# Altium PCB concentrator_pcb.PcbDoc
Units mm, origin at the board's own origin, x right, y up, seen from the top; angles counter-clockwise.
Board outline 36.52 x 56.52 mm, 2 copper layers (Top Layer, Bottom Layer); 49 components, 50 nets, 270 pads, 44 vias.
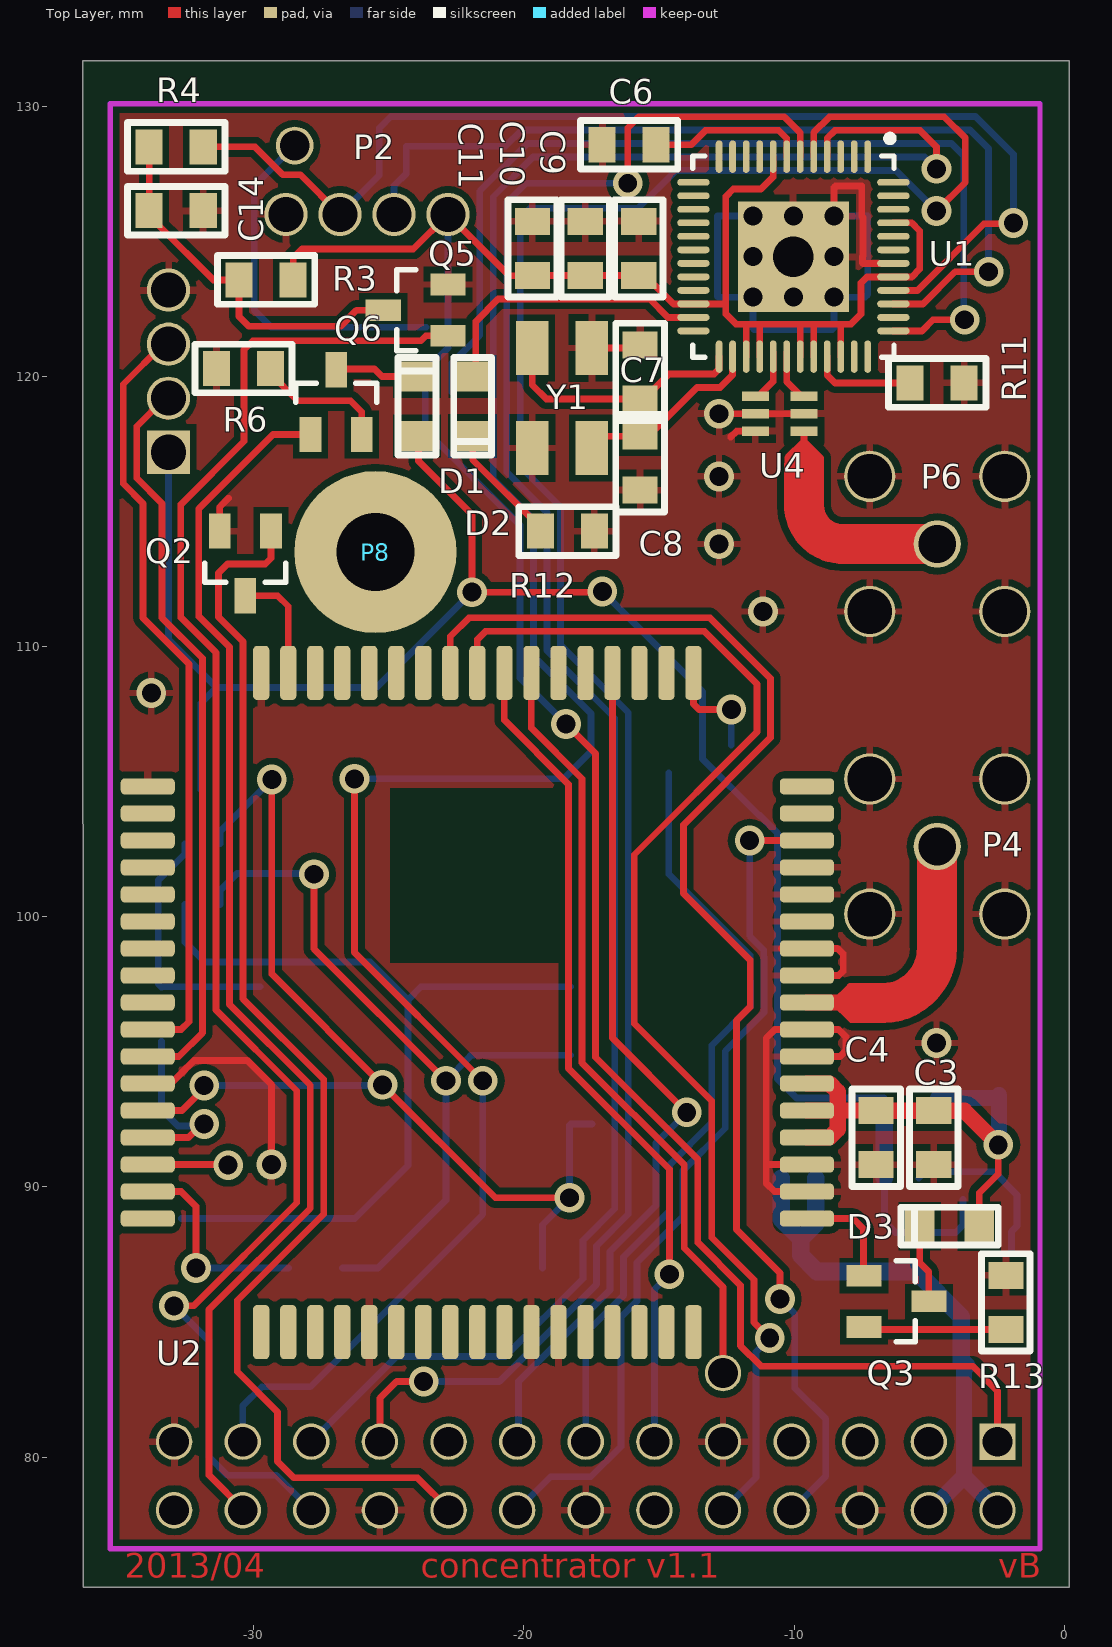
[diagram p0: Top Layer view]
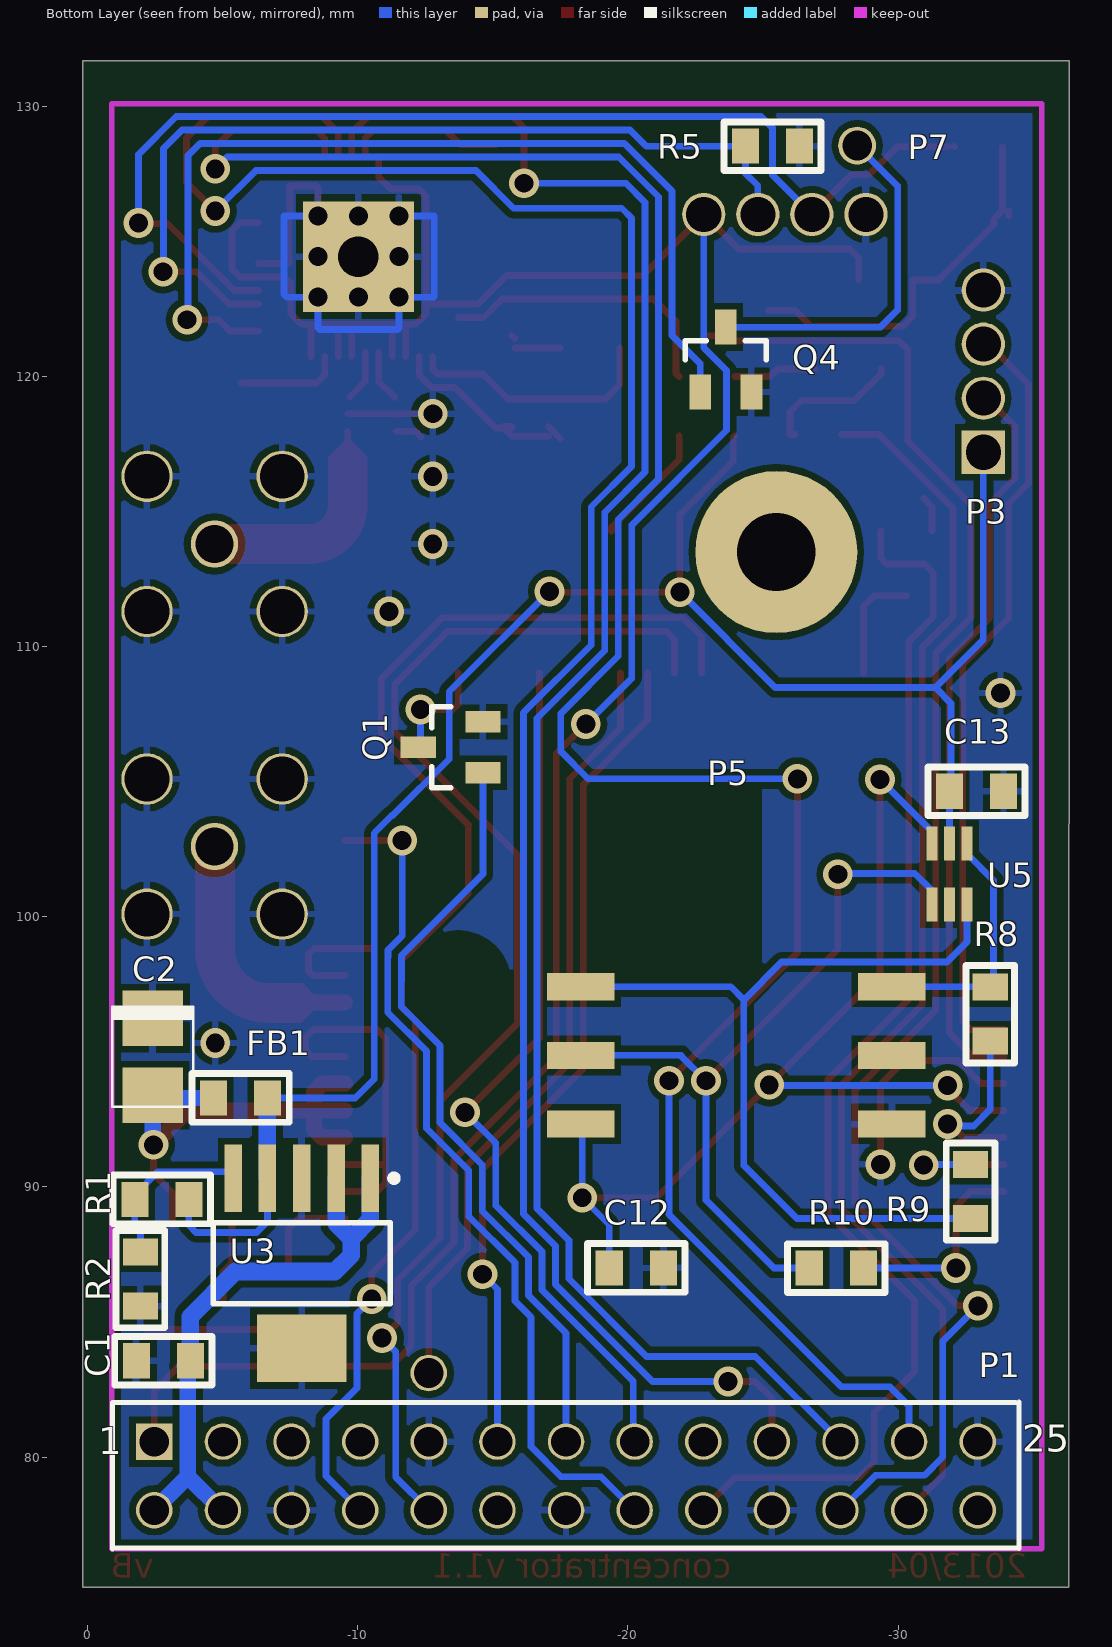
[diagram p1: Bottom Layer view, seen from below]
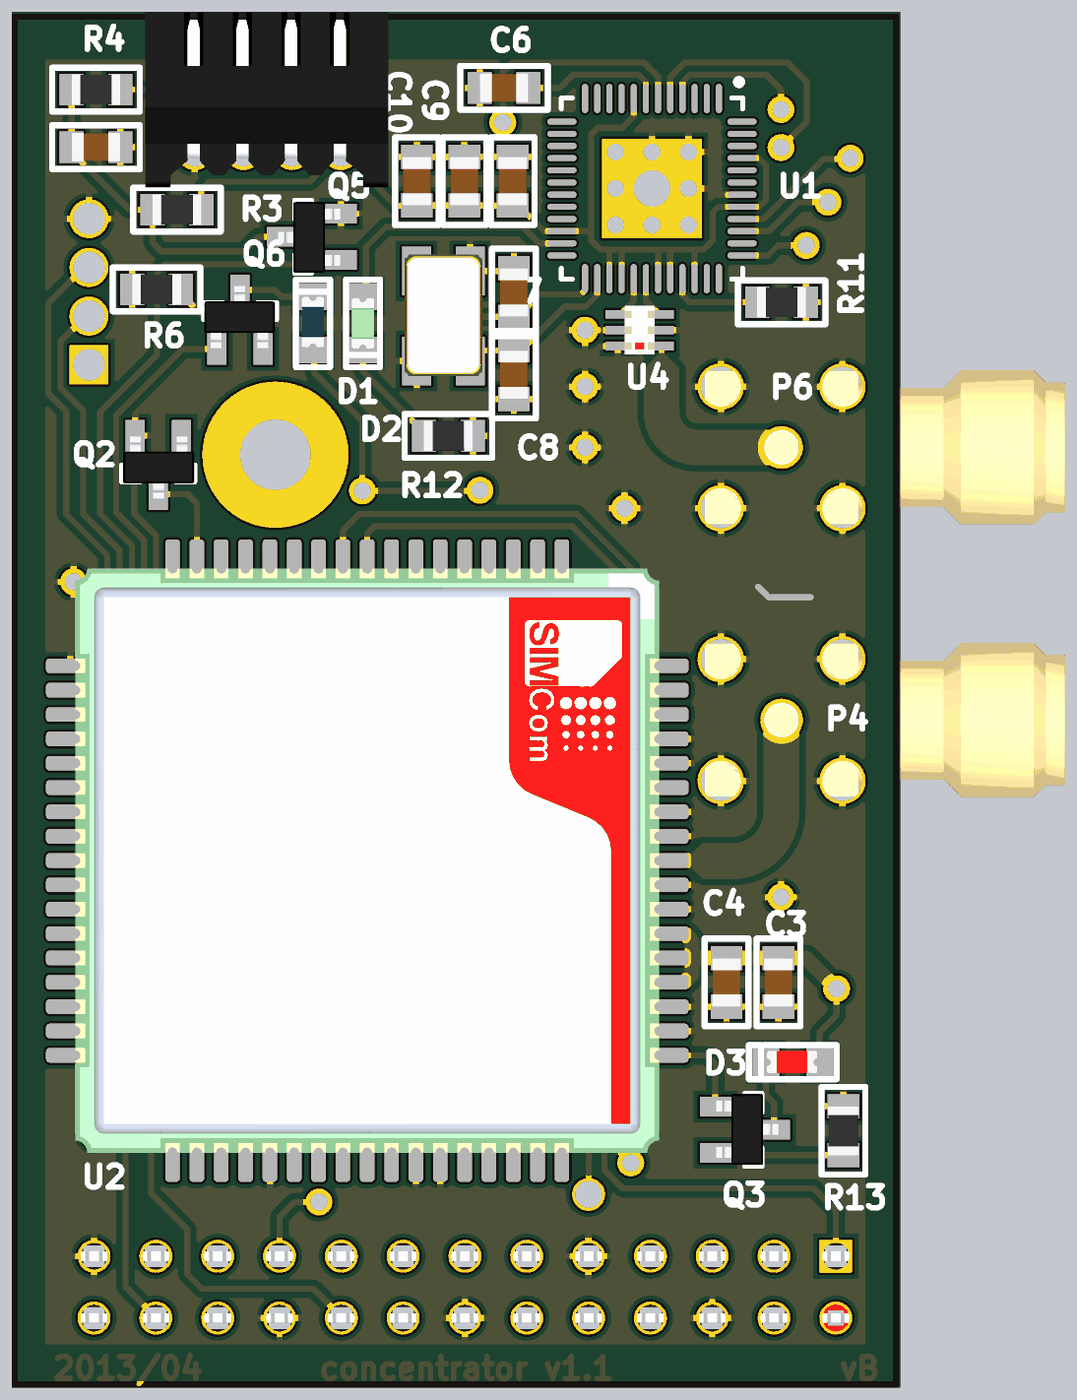
[diagram p2: 3D render of the assembled board from above, using the file's embedded part models]
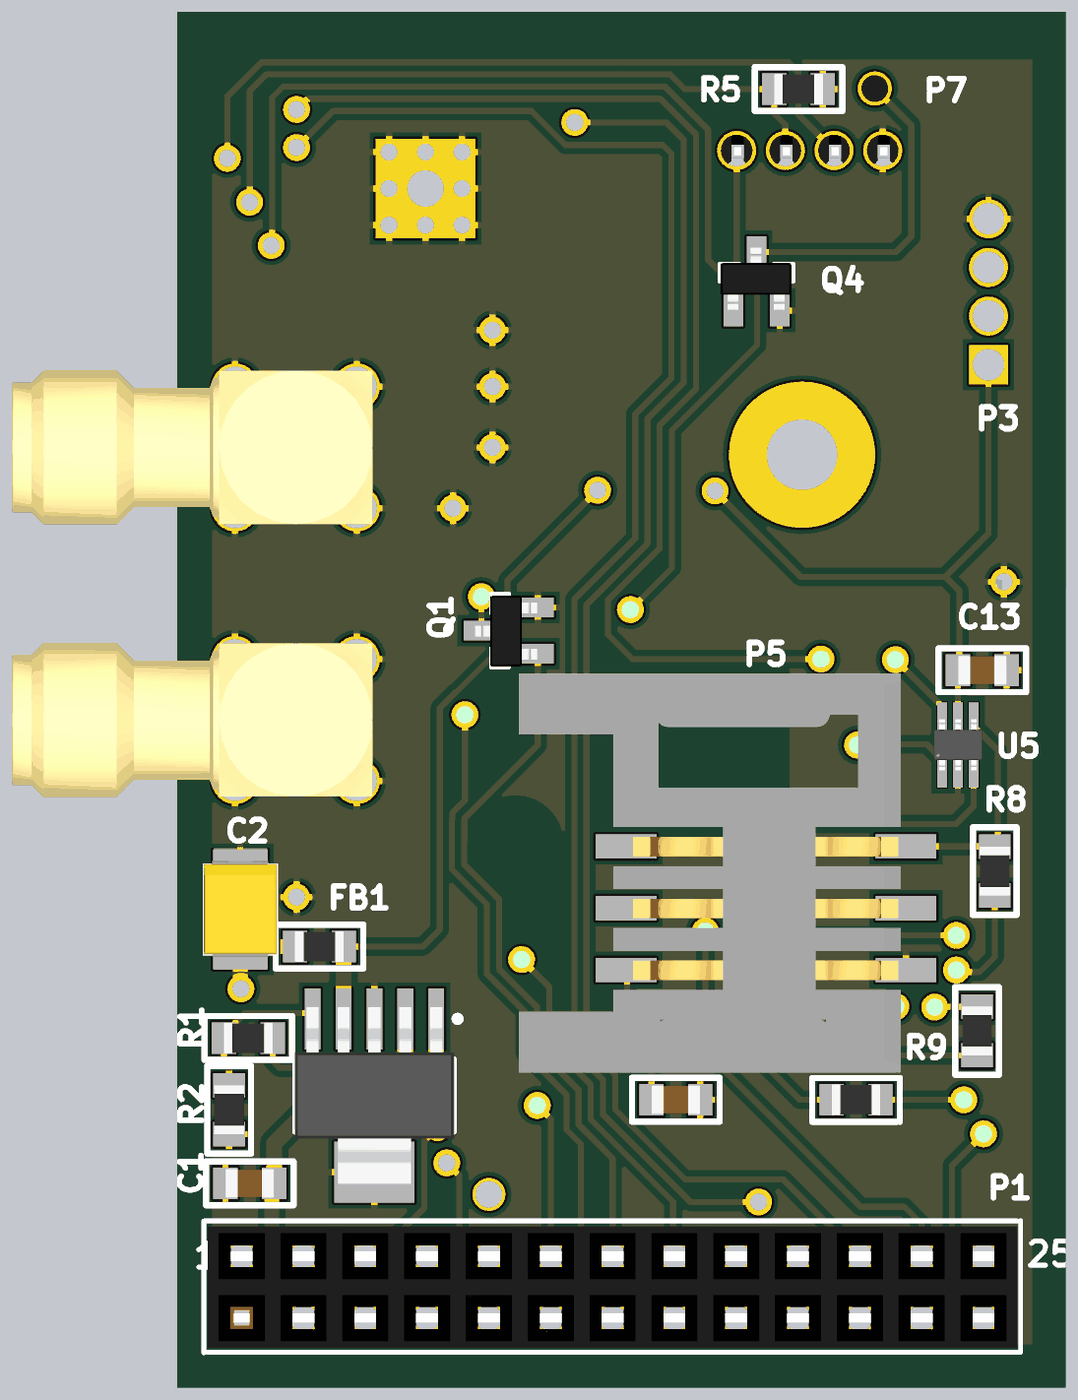
[diagram p3: 3D render of the assembled board from below, using the file's embedded part models]

## Layer stack, top to bottom
Top Layer: signal copper 0.0356
Dielectric: core 0.32, FR-4, Dk 4.8
Bottom Layer: signal copper 0.0356

## Board outline
-36.317,75.176 0.186,75.176 0.186,131.691 -36.333,131.691

## Design rules (kind name [scope] priority, off if disabled: settings)
Clearance Clearance_CC430_RF_trace [Inpoly vs InNet('NetP8_1')] p1: gap=0.65
Clearance Clearance_1 [All] p2: gap=0.25
Clearance Clearance_polygon [Inpoly] p3: gap=0.5
HoleSize [All] p1: absolutevalues=TRUE maxlimit=10 minlimit=0.7 maxpercent=80.000 minpercent=20.000
MinimumSolderMaskSliver [All] p1: minsoldermaskwidth=0.05
PolygonConnect [All] p1: connectstyle=Relief reliefconductorwidth=0.254 reliefentries=4 polygonreliefangle="90 Angle"
RoutingVias [All] p1: holewidth=0.7 width=1.1 viastyle="Through Hole" minholewidth=0.7 minwidth=1.1 maxholewidth=8 maxwidth=10
SilkToSilkClearance [All] p1 off: silktosilkclearance=0.254
SilkscreenOverComponentPads [All] p1 off: minsilkscreentomaskgap=0.254
SolderMaskExpansion [All] p1: expansion=0.102
Width [All] p1: maxlimit=2 minlimit=0.25 preferedwidth=0.25
24 further rules are at their usual default settings.

## Classes and differential pairs
component class concentrator_sch: C1 C2 C3 C7 C8 C9 C10 C11 C12 C13 C14 D1 D2 D3 FB1 P1 P2 P4 P5 P6 P8 Q3 R1 R2 R3 R4 R5 R6 R8 R9 R10 R12 R13 U1 U5

## Components (designator, comment, footprint, x,y, rotation, side; value= is the part's Value field where it differs from the comment)
C1 "10uF" 0805_CAP -2.802,83.566 r180 bottom
C2 "100uF" 3528_B -2.413,94.818 r270 bottom
C3 "100nF" 0805_CAP -4.826,91.821 r90 top
C4 "100nF" 0805_CAP -6.96,91.821 r90 top
C6 "470nF" 0805_CAP -16.104,128.575 r0 top
C7 "10pF" 0805_CAP -15.697,120.167 r270 top
C8 "10pF" 0805_CAP -15.697,116.789 r90 top
C9 "1uF" 0805_CAP -15.748,124.739 r90 top
C10 "2.2pF" 0805_CAP -17.729,124.739 r270 top
C11 "100nF" 0805_CAP -19.685,124.739 r270 top
C12 "220nF" 0805_CAP -20.308,87 r0 bottom
C13 "100nF" 0805_CAP -32.901,104.648 r0 bottom
C14 "2.2nF" 0805_CAP -32.868,126.136 r180 top
D1 "LED" 0805_LED_BLUE -23.952,118.897 r90 top
D2 "LED" 0805_LED_GREEN -21.895,118.897 r270 top
D3 "LED" 0805_LED_RED -4.242,88.544 r180 top
FB1 "FerriteBead" 0805_RES -5.664,93.294 r180 bottom
P1 "RasPI-Header" FH26p254pitch_thru-hole -17.708,79.3 r180 bottom
P2 "SBW interface" DF3A-4P-2DS -22.808,126 r180 top
P3 "Debug interface" TESTPOINT4 -33.155,117.196 r90 bottom
P4 "SMA Connector" "SMA_Connector _Right_Angle" -4.698,102.6 r270 top
P5 "SIM Socket" SIM_Card_Socket_Amphenol -24.011,94.869 r0 bottom
P6 "SMA Connector" "SMA_Connector _Right_Angle" -4.698,113.8 r270 top
P7 "Test point" TestPoint -27.711,128.524 r180 bottom
P8 "Mounting hole" MountHole -30.226,121.666 r0 top
Q1 "N-MOS" SOT23 -13.437,106.274 r0 bottom
Q2 "N-MOS" SOT23 -30.308,113.081 r270 top
Q3 "N-MOS" SOT23 -6.208,85.763 r0 top
Q4 "N-MOS" SOT23 -23.622,120.625 r90 bottom
Q5 "N-MOS" SOT23 -24.003,122.453 r180 top
Q6 "N-MOS" SOT23 -26.949,119.05 r90 top
R1 "24K" 0805_RES -2.744,89.535 r180 bottom
R2 "10K" 0805_RES -1.956,86.589 r90 bottom
R3 "33K" 0805_RES -29.54,123.571 r0 top
R4 "330R" 0805_RES -32.868,128.499 r180 top
R5 "33K" 0805_RES -25.349,128.524 r0 bottom
R6 "36R" 0805_RES -30.378,120.294 r0 top
R8 "22R" 0805_RES -33.409,96.393 r90 bottom
R9 "22R" 0805_RES -32.684,89.826 r270 bottom
R10 "22R" 0805_RES -27.711,86.995 r0 bottom
R11 "56K (1%)" 0805_RES -4.699,119.761 r180 top
R12 "43R" 0805_RES -18.39,114.275 r180 top
R13 "82R" 0805_RES -2.159,85.725 r270 top
U1 "CC430F5137" TI-RGZ48-4100X4100TP_N -10.022,124.436 r270 top
U2 "SIM900" SIM900 -21.722,96.826 r270 top
U3 "TL1963A" 6SOT-223 -7.925,87.173 r270 bottom
U4 "0868BM15C0001" JT_Balun -10.531,118.618 r270 top
U5 "TPD4E001" SC70-6 -31.25,100.457 r180 bottom
Y1 "XTAL_RF" xtal_rf -18.593,119.202 r270 top

## Footprints (in the part's own frame and the unit in brackets; to place one, negate y for a bottom-side part, rotate by r counter-clockwise, add the part's x,y. Pads: shape width x height; smd on the part's side, far side on the other; paste and mask are expansions set on the pad)
6SOT-223 [mm] "(based on TL1963A) SOT223, 6-Leads, Body 6,6x7,3mm (max), Pitch 1,27mm, IPC Medium Density"
  rect 2.5x0.65 smd: 1(-3.15,2.54) 2(-3.15,1.27) 3(-3.15,0) 4(-3.15,-1.27) 5(-3.15,-2.54)
  rect 2.5x3.3 smd: 6(3.15,0)
  silkscreen extent -3.27,-3.27 1.5,3.54, body extent -3.63,-3.27 3.63,3.28, height 1.8
0805_CAP [mm] "0805_Cap"
  rect 1x1.3 smd: 1(-1,0) 2(1,0)
  silkscreen extent -1.8,-0.9 1.8,0.9, body extent -1,-0.6 1,0.6, height 1.2
0805_LED_BLUE [mm] "0805 Blue LED"
  rect 1.1x1.3 smd: 1(-1.1,0) 2(1.1,0)
  silkscreen extent -1.8,-0.7 1.8,0.7, body extent -0.98,-0.45 1.08,0.46, height 0.85
0805_LED_GREEN [mm] "0805 Green LED"
  rect 1.1x1.3 smd: 1(-1.1,0) 2(1.1,0)
  silkscreen extent -1.8,-0.7 1.8,0.7, body extent -1.03,-0.46 1.03,0.45, height 0.85
0805_LED_RED [mm] "0805 Red LED"
  rect 1.1x1.3 smd: 1(-1.1,0) 2(1.1,0)
  silkscreen extent -1.8,-0.7 1.8,0.7, body extent -1.01,-0.45 1.06,0.46, height 0.85
0805_RES [mm] "0805_Res"
  rect 1x1.3 smd: 1(-1,0) 2(1,0)
  silkscreen extent -1.8,-0.9 1.8,0.9, body extent -1,-0.62 1,0.63, height 0.5
3528_B [mm] "3528 TANTaL SMD \"B\"-Package"
  rect 2.05x2.25 smd: 1(1.425,0) 2(-1.425,0)
  silkscreen extent -1.85,-1.5 1.85,1.5, body extent -2.52,-1.5 2.48,1.5, height 2.11
DF3A-4P-2DS [mm] "Based on Hirose DF3A-4P-2DS model."
  round 1.6 hole 1.3: 1(0,0) 2(2,0) 3(4,0) 4(6,0)
  body extent -1.96,-5.68 8.04,1.52, height 5.05
FH26p254pitch_thru-hole [mm] "Connector; Header; 13x2 Position, 2.54mm pitch, thru-hole"
  rect 1.35x1.35 hole 1.1: 1(-15.24,1.27)
  round 1.35 hole 1.1: 2(-15.24,-1.27) 3(-12.7,1.27) 4(-12.7,-1.27) 5(-10.16,1.27) 6(-10.16,-1.27) 7(-7.62,1.27) 8(-7.62,-1.27) 9(-5.08,1.27) 10(-5.08,-1.27) 11(-2.54,1.27) 12(-2.54,-1.27) 13(0,1.27) 14(0,-1.27) 15(2.54,1.27) 16(2.54,-1.27) 17(5.08,1.27) 18(5.08,-1.27) 19(7.62,1.27) 20(7.62,-1.27) 21(10.16,1.27) 22(10.16,-1.27) 23(12.7,1.27) 24(12.7,-1.27) 25(15.24,1.27) 26(15.24,-1.27) 27(-5.08,3.81)
  silkscreen extent -16.79,-2.69 16.77,2.73, body extent -16.63,-2.5 16.64,2.5, height 8.5
JT_Balun [mm] "footprint of 0868BM15C0001"
  rect 0.35x1 smd: 1(0.65,0.9) 2(0,0.9) 3(-0.65,0.9) 4(-0.65,-0.9) 5(0,-0.9) 6(0.65,-0.9)
  body extent -1,-0.62 1,0.63, height 0.8
MountHole [mm]
  round 6 hole 2.9: 1(4.732,-8.166)
SC70-6 [mm] "Based on SMF05C supressor dioide array"
  rect 0.4x1.25 smd mask+0.05: 1(0,0) 2(0.65,0) 3(1.3,0) 4(1.3,2.25) 5(0.65,2.25) 6(0,2.25)
  body extent -0.35,0.08 1.65,2.18, height 0.92
SIM900 [mm]
  rrect50% 2x0.6 smd: 1(-12.2,8) 2(-12.2,7) 3(-12.2,6) 4(-12.2,5) 5(-12.2,4) 6(-12.2,3) 7(-12.2,2) 8(-12.2,1) 9(-12.2,0) 10(-12.2,-1) 11(-12.2,-2) 12(-12.2,-3) 13(-12.2,-4) 14(-12.2,-5) 15(-12.2,-6) 16(-12.2,-7) 17(-12.2,-8) 35(12.2,-8) 36(12.2,-7) 37(12.2,-6) 38(12.2,-5) 39(12.2,-4) 40(12.2,-3) 41(12.2,-2) 42(12.2,-1) 43(12.2,0) 44(12.2,1) 45(12.2,2) 46(12.2,3) 47(12.2,4) 48(12.2,5) 49(12.2,6) 50(12.2,7) 51(12.2,8)
  rrect50% 0.6x2 smd: 18(-8,-12.2) 19(-7,-12.2) 20(-6,-12.2) 21(-5,-12.2) 22(-4,-12.2) 23(-3,-12.2) 24(-2,-12.2) 25(-1,-12.2) 26(0,-12.2) 27(1,-12.2) 28(2,-12.2) 29(3,-12.2) 30(4,-12.2) 31(5,-12.2) 32(6,-12.2) 33(7,-12.2) 34(8,-12.2) 52(8,12.2) 53(7,12.2) 54(6,12.2) 55(5,12.2) 56(4,12.2) 57(3,12.2) 58(2,12.2) 59(1,12.2) 60(0,12.2) 61(-1,12.2) 62(-2,12.2) 63(-3,12.2) 64(-4,12.2) 65(-5,12.2) 66(-6,12.2) 67(-7,12.2) 68(-8,12.2)
  rect 6x6 on Keep-Out: 69(-4.7,0)
  round 3.45 on Keep-Out: 70(-0.7,8)
  body extent -12,-12 12,12, height 3.02
SIM_Card_Socket_Amphenol [mm] "Based on Amphenol TSM-AY254-6P SIM socket"
  rect 2.5x1 smd: 3(-5.75,-2.54) 4(5.75,-2.54) 5(-5.75,0) 6(5.75,0) 7(-5.75,2.54) 8(5.75,2.54)
  body extent -5.54,-9.65 10.16,6.75, height 3
"SMA_Connector _Right_Angle" [mm] "LPRF low cost sma connector (Right Angle)"
  round 1.75 hole 1.4: 1(0,0)
  round 1.9 hole 1.65: 2(-2.5,2.5) 3(-2.5,-2.5) 4(2.5,-2.5) 5(2.5,2.5)
  body extent -3.16,-3.15 3.16,11.66, height 9.6
SOT23 [mm]
  rect 1.3x0.8 smd: 1(-1.2,0.95) 2(-1.2,-0.95) 3(1.2,0)
  silkscreen extent 0,-1.5 0.7,1.5, body extent -1.17,-1.44 1.38,1.48, height 0.94
TestPoint [mm] "Test Point"
  round 1.4 hole 1.1: 1(0.772,0.022)
TESTPOINT4 [mm] "Based on Hirose DF3A-4P-2DS model."
  rect 1.6x1.6 hole 1.3: 1(0,0)
  round 1.6 hole 1.3: 2(2,0) 3(4,0) 4(6,0)
TI-RGZ48-4100X4100TP_N [mm] "QFN, 48-Leads, Body 7x7mm, Pitch 0.5mm, Thermal Pad 4.1x4.1mm, IPC Medium Density"
  oval 1.2x0.25 smd mask+0.1: 1(-3.7,2.75) 2(-3.7,2.25) 3(-3.7,1.75) 4(-3.7,1.25) 5(-3.7,0.75) 6(-3.7,0.25) 7(-3.7,-0.25) 8(-3.7,-0.75) 9(-3.7,-1.25) 10(-3.7,-1.75) 11(-3.7,-2.25) 12(-3.7,-2.75)
  oval 0.25x1.2 smd mask+0.1: 13(-2.75,-3.7) 14(-2.25,-3.7) 15(-1.75,-3.7) 16(-1.25,-3.7) 17(-0.75,-3.7) 18(-0.25,-3.7) 19(0.25,-3.7) 20(0.75,-3.7) 21(1.25,-3.7) 22(1.75,-3.7) 23(2.25,-3.7) 24(2.75,-3.7) 37(2.75,3.7) 38(2.25,3.7) 39(1.75,3.7) 40(1.25,3.7) 41(0.75,3.7) 42(0.25,3.7) 43(-0.25,3.7) 44(-0.75,3.7) 45(-1.25,3.7) 46(-1.75,3.7) 47(-2.25,3.7) 48(-2.75,3.7)
  oval 1.2x0.25 smd paste+0 mask+0.1: 25(3.7,-2.75) 26(3.7,-2.25) 27(3.7,-1.75) 28(3.7,-1.25) 29(3.7,-0.75) 30(3.7,-0.25) 31(3.7,0.25) 32(3.7,0.75) 33(3.7,1.25) 34(3.7,1.75) 35(3.7,2.25) 36(3.7,2.75)
  rect 4.1x4.1 hole 1.5: 49(0,0)
  silkscreen extent -4.5,-3.72 3.72,3.73, body extent -3.58,-3.57 3.57,3.58, height 1
xtal_rf [mm] "Based on TXC - 7B-26.000MEEQ-T"
  rect 2x1.2 smd: 1(-1.85,-1.1) 2(1.85,-1.1) 3(1.85,1.1) 4(-1.85,1.1)
  body extent -2.53,-1.6 2.47,1.6, height 1

## Part data
C1 C3 C4 C6 C12 C13 C14: library part Capacitor, "Capacitor"
C2: library part Cap-Elco, "Polarized Capacitor"
C7 C8 C9 C10 C11: library part CAP, "Capacitor"
D1 D2 D3: "Typical GaAs LED"
FB1: "Ferrite Bead"
P1: library part RasPI-FHeader, "Female Header of raspberry pi 13x2 GPIO connector"
P2: library part SBW-interface, "4 pole connector for debugging and programming"
P3: library part Debug-interface, "4 pole connector for SIM900 serial debug communication"
P4 P6: library part SMA-Connector, "LRPS PCB Mount Connector, Thru-Hole"
P5: library part SIM-Socket, "SIM socket according to Assman A-SIM-08-06-C-003 model"
P7: library part TestPoint
P8: library part MountHole, "Mounting hole - 2.9mm drilled diameter"
Q1 Q2 Q3 Q4 Q5 Q6: "FDV301N, N CH, 25V, 0.22A, SOT23"
R1 R2 R6 R8 R9 R10 R12 R13: library part Resistor, "Resistor"
R3 R4 R5 R11: library part RES, "Resistor"
U1: library part CC430F5137IRGZR, "20 MHz MSP430 SoC with RF Core with 32 KB Flash, 4096 B SRAM and 30 GPIOs, -40 to 85 degC, 48-pin QFN (RGZ), Green (RoHS & no Sb/Br)"
U2: "SIM900 GSM modul"
U3: "Adjustable LDO up to 1.5A"
U4: "868MHz Impedance Matched/Balun/BPF Integrated Component for T.I. CC110X, CC430, etc."
U5: library part TPD4E001DCKR, "Low-Capacitance + / - 15-kV ESD Protection Array for High-Speed Data Interfaces, 4 Channels, -40 to +85 degC, 6-pin SOT70 (DCK), Green (RoHS & no Sb/Br)"
Y1: "Crystal Oscillator"

## Via types
v1: diameter 1.1, hole 0.7, Top Layer to Bottom Layer, 44 vias

## Nets (pads, with @x,y where several pads share a name; then routed paths per layer and width w, separated by ;. In a path a pad name is that pad's centre, name@x,y a point inside that pad or via, vN(x,y) a via of type N, cw(c..) or ccw(c..) an arc to the next point about the centre after c; other vN are vias at no path point)
3V3: C9.1 C10.2 C11.2 P1.1 P2.1 R3.2 U1.8 U1.22 U1.27 U1.28 U1.31 U1.32 U1.34 U1.41 U1.45 | length 102.2
  Top Layer w0.25: R3.2 -28.54,124.384 -28.21,124.714 -24.094,124.714 P2.1 -20.531,123.723 -19.701,123.723 C11.2 ; C11.2 C10.2 C9.1 -15.509,123.739 -14.456,122.686 U1.22 -12.572,122.686 ; v1(-18.44,107.137) -17.347,106.044 -17.347,94.801 -13.56,91.014 -13.56,87.936 -11.981,86.357 -11.981,84.117 -11.227,83.363 -3.382,83.363 -2.468,82.448 P1.1 ; -12.522,122.305 -12.153,121.936 -7.892,121.936 -7.522,122.305 -7.522,123.466 -7.302,123.686 U1.41 -5.64,123.686 -5.347,123.978 -5.347,125.393 -5.64,125.686 U1.45 ; -12.522,122.336 -12.522,126.663 -12.25,126.936 -11.222,126.936 -10.772,127.386 U1.8 ; U1.27 -11.772,121.886 ; U1.28 -11.272,121.886 ; U1.31 -9.772,121.886 ; U1.32 -9.272,121.886 ; U1.34 -8.272,121.886
  Bottom Layer w0.25: P2.1 -22.808,121.059 -23.647,120.219 -23.647,118.008 -20.142,114.503 -20.142,108.839 v1(-18.44,107.137)
4V: C13.2 D1.1 FB1.2 P3.1 R1.2 U3.4 U5.5 | length 71.6
  Top Layer w0.25: D1.1 -23.901,117.747 -23.901,116.875 -21.92,114.894 v1(-21.92,112.014) -17.12,112.014 v1(-17.094,112.039)
  Bottom Layer w0.25: P3.1@-33.406,117.002 P3.1@-33.208,117.2 ; P3.1 -33.155,110.261 -31.377,108.483 ; U5.5 C13.2 C13.2 -31.961,104.708 -31.961,107.899 -31.377,108.483 ; v1(-21.92,112.014) -25.451,108.483 -31.377,108.483 ; v1(-17.094,112.039) -13.386,108.331 -13.386,105.842 -11.288,103.744 -11.258,103.744 -10.608,103.094 -10.608,93.996 -9.906,93.294 FB1.2 ; U3.4 -6.655,88.722 -6.248,88.316 -4.013,88.316 -3.744,88.585 R1.2
  Bottom Layer w0.65: U3.4 FB1.2@-6.655,93.005
5V: C1.2 P1.2 P1.4 U3.1 U3.2 | length 22.3
  Bottom Layer w0.6: P1.4@-4.958,78.03 -3.708,79.28 ; C1.2@-3.708,83.472 -3.708,79.28 ; P1.2@-2.418,78.03 -2.458,78.03 -3.708,79.28
  Bottom Layer w0.65: U3.1 -10.465,88.798 -9.754,88.087 ; U3.2 -9.195,88.646 -9.754,88.087 ; P1.4@-4.958,78.03 P1.4@-4.958,78.18 ; C1.2@-3.608,83.372 -3.708,83.472 C1.2 -3.802,85.201 -5.469,86.868 -9.152,86.868 -9.754,87.47 -9.754,88.087
GND: C1.1 C2.2 C3.1 C4.1 C6.1 C7.1 C8.1 C9.2 C10.1 C11.1 C12.1 C13.1 C14.1 P1.6 P1.9 P1.14 P1.20 P1.25 P2.4 P3.4 P4.2 P4.3 P4.4 P4.5 P5.7 P6.2 P6.3 P6.4 P6.5 Q1.2 Q2.2 Q4.2 Q5.2 R2.1 R5.1 R6.1 R11.1 R12.1 R13.1 U1.42 U1.49 U2.17 U2.18 U2.29 U2.39 U2.45 U2.46 U2.53 U2.54 U2.58 U2.59 U2.61 U2.62 U2.63 U2.64 U2.65 U3.3 U3.6 U4.2 U4.5 U4.6 U5.2 Y1.2 Y1.4 | length 56.3
  Top Layer w0.25: U2.29 -33.068,93.826 -32.218,94.676 -30.233,94.676 -29.345,93.788 v1(-29.345,90.83) ; Q2.2 -31.258,115.173 -30.937,115.494 ; Y1.4 C7.1@-15.812,121.052 ; C7.1@-15.812,121.408 C7.1@-15.697,121.523 ; v1(-12.776,118.618) U4.5@-11.432,118.618 ; -12.344,117.76 -12.136,117.968 U4.6@-11.431,117.968 ; U4.5@-11.456,118.593 U4.5@-11.431,118.618 ; U2.62@-10.467,98.826 U2.62 -8.387,98.826 -8.179,98.617 -8.179,97.993 -8.346,97.826 U2.61 ; U4.2 U4.5@-11.431,118.618 ; U2.53 -10.713,89.826 -11.032,90.145 -11.032,90.805 ; U2.54 -11.011,90.826 -11.032,90.805 ; U2.58 -8.298,94.826 -8.077,95.047 -8.077,95.555 -8.348,95.826 U2.59 -10.71,95.826 -11.032,95.504 -11.032,90.805 ; v1(-8.522,125.936) -8.522,126.987 -8.458,127.051 -7.493,127.051 -7.493,125.938 -7.495,125.936 -7.442,125.882 -7.442,124.46 -7.467,124.436 -7.467,124.205 -7.447,124.186 U1.42
  Bottom Layer w0.25: v1(-11.522,125.936) -12.829,125.936 -12.829,122.964 -12.802,122.936 v1(-11.522,122.936) -11.522,121.784 -11.481,121.742 -8.585,121.742 -8.522,121.805 v1(-8.522,122.936) -7.371,122.936 -7.267,123.04 -7.267,125.936 v1(-8.522,125.936)
  other v1: -4.724,95.326 -33.79,108.28 -11.151,111.3 -12.776,113.8 -12.776,116.3 -10.022,122.936 -11.522,124.436 -8.522,124.436 -10.022,125.936
NetC6_2: C6.2 U1.7 | length 5.9
  Top Layer w0.25: C6.2 -13.808,128.575 -13.272,129.111 -10.565,129.111 -10.272,128.818 U1.7
NetC7_2: C7.2 U1.25 Y1.1 | length 9.4
  Top Layer w0.25: Y1.1 -19.693,119.693 -19.168,119.167 C7.2 -15.554,119.167 -14.63,120.091 -12.954,120.091 -12.772,120.273 U1.25
NetC8_2: C8.2 U1.26 Y1.3 | length 7.7
  Top Layer w0.25: Y1.3@-17.493,117.708 Y1.3@-17.056,118.145 ; Y1.3@-17.056,117.789 C8.2 -15.395,118.091 -15.093,118.091 -13.593,119.591 -12.734,119.591 -12.272,120.053 U1.26 ; C8.2@-15.426,118.114 -15.728,118.114 -15.697,118.145 C8.2@-15.395,118.145
NetC12_2: C12.2 P5.8 U2.30 U5.6 | length 40.5
  Top Layer w0.25: U2.30 -32.658,92.826 -31.835,93.649 v1(-31.835,93.751) ; v1(-29.328,105.08) -29.328,97.875 v1(-25.23,93.777) -21.053,89.6 v1(-18.308,89.6)
  Bottom Layer w0.25: v1(-31.835,93.751) -25.256,93.751 v1(-25.23,93.777) ; U5.6 -31.25,103.158 v1(-29.328,105.08) ; C12.2 -19.308,88.6 v1(-18.308,89.6) -18.308,92.282 P5.8 P5.8@-17.479,92.329
NetC14_2: C14.2 Q5.3 R3.1 R4.2 | length 14.1
  Top Layer w0.25: C14.2@-34.096,125.943 C14.2@-34.096,126.136 ; R4.2 C14.2 -33.553,125.822 -33.553,125.628 -31.496,123.571 R3.1 -30.54,122.218 -30.179,121.857 -26.784,121.857 -26.187,122.453 Q5.3
NetD1_2: D1.2 Q6.3 | length 3.1
  Top Layer w0.25: Q6.3@-26.924,120.275 -25.533,120.275 -25.255,119.997 D1.2
NetD2_1: D2.1 U1.23 | length 10.8
  Top Layer w0.25: D2.1 -21.778,120.114 -21.778,122.037 -20.951,122.864 -15.341,122.864 -14.663,122.186 U1.23
NetD2_2: D2.2 R12.2 | length 4.6
  Top Layer w0.25: D2.2 -21.895,116.916 -19.39,114.411 R12.2
NetD3_2: D3.2 Q3.3 | length 2.9
  Top Layer w0.25: D3.2 -5.342,87.181 -5.008,86.847 Q3.3
NetP1_8: P1.8 U2.10 | length 49.7
  Top Layer w0.25: U2.10 -22.722,110.382 -22.038,111.066 -13.11,111.066 -10.87,108.826 -10.87,106.631 -14.097,103.404 ; -14.09,103.397 -14.09,100.864 -11.622,98.396 -11.622,96.656 -12.126,96.152 -12.126,88.427 -10.516,86.817 v1(-10.516,85.852)
  Bottom Layer w0.25: v1(-10.516,85.852) -9.972,85.308 -9.972,82.557 -8.822,81.407 -8.822,79.296 P1.8
NetP1_10: P1.10 U2.9 | length 47.9
  Top Layer w0.25: U2.9 -21.722,110.264 -21.42,110.566 -13.318,110.566 -11.37,108.619 -11.37,106.838 -15.913,102.295 -15.913,96.05 -13.045,93.182 -13.045,88.129 -11.481,86.564 -11.481,84.988 v1(-10.897,84.404) ; P1.10 P1.10@-12.529,78.03
  Bottom Layer w0.25: P1.10 -11.407,79.251 -11.407,83.893 v1(-10.897,84.404)
NetP1_11: P1.11 U2.8 | length 31.2
  Top Layer w0.25: U2.8 -20.722,107.276 -18.347,104.901 -18.347,94.387 -14.613,90.653 v1(-14.613,86.766)
  Bottom Layer w0.25: P1.11 -15.168,86.211 v1(-14.613,86.766)
NetP1_13: P1.13 Q1.1 | length 28.5
  Bottom Layer w0.25: P1.13 -17.708,84.587 -16.315,85.98 -16.315,87.401 -14.607,89.109 -14.607,90.816 -13.045,92.378 -13.045,95.233 -11.608,96.67 -11.608,97.612 -11.622,97.626 -11.622,98.566 -14.637,101.581 Q1.1
NetP1_15: P1.15 U2.4 | length 32.2
  Top Layer w0.25: U2.4 -16.722,95.513 v1(-13.97,92.761)
  Bottom Layer w0.25: P1.15@-20.198,80.57 -20.198,82.804 -16.815,86.187 -16.815,87.609 -15.107,89.316 -15.107,91.624 v1(-13.97,92.761)
NetP1_16: P1.16 U2.66 | length 31.8
  Top Layer w0.25: v1(-11.641,102.819) -11.634,102.826 U2.66
  Bottom Layer w0.25: P1.16 -19.008,79.27 -17.523,79.27 -16.408,80.385 -16.408,85.179 -15.815,85.773 -15.815,87.194 -14.107,88.902 -14.107,90.608 -12.545,92.171 -12.545,95.026 -11.108,96.463 -11.108,98.501 -11.122,98.515 -11.122,98.773 -11.641,99.293 v1(-11.641,102.819)
NetP1_18: P1.18 Q2.1 | length 46.8
  Top Layer w0.25: Q2.1 -29.358,113.271 -29.574,113.055 -30.971,113.055 -31.301,112.725 -31.301,111.093 -30.397,110.189 -30.397,96.962 -27.408,93.973 -27.408,89 -30.608,85.8 -30.608,83.16 -29.116,81.668 -29.116,79.832 -28.514,79.23 -23.938,79.23 P1.18@-22.738,78.03
NetP1_19: P1.19 U1.5 | length 80
  Top Layer w0.25: P1.19 -25.328,82.18 -24.708,82.8 v1(-23.708,82.8) ; U1.5 -9.272,129.025 -8.686,129.611 -4.439,129.611 -3.658,128.829 -3.658,127.188 v1(-4.724,126.122)
  Bottom Layer w0.25: v1(-23.708,82.8) -20.909,82.8 -17.315,86.394 -17.315,87.816 -16.136,88.994 -16.136,107.555 -18.642,110.061 -18.642,115.176 -20.133,116.666 -20.133,125.867 -19.772,126.227 -15.771,126.227 -14.374,127.625 -6.227,127.625 v1(-4.724,126.122)
NetP1_21: P1.21 U1.6 | length 69.3
  Top Layer w0.25: v1@-15.979,127.328 v1(-16.154,127.152) -16.154,129.204 -15.979,129.38 -15.749,129.611 -10.358,129.611 -9.772,129.025 U1.6
  Bottom Layer w0.25: P1.21 -24.713,83.725 -20.691,83.725 -17.815,86.601 -17.815,88.023 -16.636,89.202 -16.636,107.348 -19.142,109.854 -19.142,114.969 -20.633,116.459 -20.633,126.446 -19.926,127.152 v1(-16.154,127.152)
NetP1_22: P1.22 Q5.1 | length 59
  Top Layer w0.25: v1(-32.952,85.598) -32.224,85.598 -28.408,89.414 -28.408,93.559 -31.397,96.548 -31.397,109.775 -32.698,111.076 -32.698,115.265 -30.361,117.602 -30.361,120.992 -30.034,121.319 -23.816,121.319 -23.632,121.503 Q5.1
  Bottom Layer w0.25: v1(-32.952,85.598) -31.656,84.303 -31.656,80.01 -30.971,79.324 -29.162,79.324 P1.22
NetP1_23: P1.23 U1.4 | length 85.6
  Top Layer w0.25: v1(-26.272,105.105) -26.272,98.679 v1(-21.522,93.929) ; U1.4 -8.772,128.818 -8.479,129.111 -5.336,129.111 -4.724,128.499 v1(-4.724,127.686)
  Bottom Layer w0.25: P1.23 -30.408,81.893 -29.701,82.6 -27.908,82.6 -21.522,88.986 v1(-21.522,93.929) ; v1(-26.272,105.105) -18.529,105.105 -17.515,106.119 -17.515,107.52 -19.642,109.647 -19.642,114.71 -21.133,116.201 -21.133,126.653 -19.66,128.125 -5.164,128.125 v1(-4.724,127.686)
NetP1_24: P1.24 Q6.1 | length 46.1
  Top Layer w0.25: P1.24@-30.358,78.03 -31.656,79.328 -31.656,85.459 -27.908,89.207 -27.908,93.766 -30.897,96.755 -30.897,109.982 -32.033,111.118 -32.033,115.105 -29.289,117.85 Q6.1
NetP1_27: P1.27 U2.7 | length 28.9
  Top Layer w0.25: U2.7 -19.722,106.983 -17.847,105.108 -17.847,94.594 -14.06,90.807 -14.06,87.729 -12.628,86.297 P1.27
NetP2_2: P2.2 R5.2 U1.39 | length 33.7
  Top Layer w0.25: U1.39 -5.226,122.686 -4.036,123.876 v1(-2.794,123.876)
  Bottom Layer w0.25: P2.2@-24.469,126 P2.2 -24.808,127.059 -24.349,127.517 R5.2 -20.676,128.524 -20.075,129.125 -3.488,129.125 -2.805,128.442 -2.805,123.886 v1(-2.794,123.876)
NetP2_3: P2.3 R4.1 U1.40 | length 42.2
  Top Layer w0.25: R4.1@-32.096,128.499 R4.1@-32.071,128.524 ; R4.1 -29.956,128.499 -28.928,127.471 -28.279,127.471 P2.3 ; U1.40 -5.433,123.186 -2.965,125.654 -1.905,125.654 v1(-1.88,125.679)
  Bottom Layer w0.25: P2.3 -25.349,127.458 -25.349,129.204 -24.929,129.625 -3.281,129.625 -1.88,128.224 v1(-1.88,125.679)
NetP3_2: P3.2 U2.28 | length 28
  Top Layer w0.25: U2.28 -32.775,94.826 -31.897,95.704 -31.897,109.568 -33.394,111.064 -33.394,115.301 -34.33,116.237 -34.33,118.151 -33.285,119.196 P3.2 ; P3.2@-33.338,119.2 P3.2@-33.208,119.2 ; P3.2@-33.208,118.537 P3.2@-33.208,119
NetP3_3: P3.3 U2.27 | length 28.5
  Top Layer w0.25: U2.27 -32.685,95.826 -32.397,96.114 -32.397,109.361 -34.095,111.058 -34.095,115.295 -34.83,116.03 -34.83,119.712 -33.346,121.196 P3.3
NetP4_1: P4.1 U2.60 | length 13.3
  Top Layer w0.25: -8.49,96.826 -8.517,96.826 ; -7.934,97.409 -8.517,96.826 ; -7.877,96.186 -8.517,96.826
  Top Layer w0.253: -7.877,96.186 -7.337,96.186
  Top Layer w0.261: -7.934,97.409 -7.417,97.409
  Top Layer w0.6: U2.60 -8.517,96.826 ; -8.49,96.826 -6.734,96.826 -6.708,96.8
  Top Layer w1.48: -7.442,96.8 -6.708,96.8 ccw(c-6.734,98.826) -4.708,98.852 P4.1@-4.708,102.6
NetP5_3: P5.3 R8.2 U5.4 | length 9.4
  Bottom Layer w0.25: U5.4 -32.55,102.332 -33.536,101.346 -33.536,97.52 R8.2 -33.393,97.409 P5.3
NetP5_4: P5.4 R9.2 U5.3 | length 32.1
  Bottom Layer w0.25: R9.2 -26.26,88.826 -24.29,90.796 -24.29,96.926 ; U5.3 -32.55,99.065 -31.809,98.323 -25.687,98.323 -24.29,96.926 ; P5.4 -23.808,97.409 -24.29,96.926
NetP5_6: P5.6 R10.2 U5.1 | length 28.2
  Top Layer w0.25: -27.77,98.814 v1(-22.885,93.929) ; -27.77,98.839 v1(-27.77,101.575)
  Bottom Layer w0.25: U5.1 -31.25,100.965 -30.615,101.6 -27.796,101.6 v1(-27.77,101.575) ; R10.2 -25.4,86.995 -22.885,89.51 v1(-22.885,93.929) -21.971,94.843 -21.971,94.869 P5.6
NetP6_1: P6.1 U4.1 | length 10.5
  Top Layer w0.25: -10.236,116.459 -10.236,116.992 -9.631,117.597 ; U4.1 -9.631,117.597 ; -9.017,116.484 -9.017,116.983 -9.631,117.597
  Top Layer w1.47: -9.627,115.138 -9.627,116.688 ; -9.627,115.288 ccw(c-8.197,115.23) -8.255,113.8 ; -8.255,113.8 P6.1
NetP7_1: P7.1 Q4.3 | length 13.3
  Bottom Layer w0.25: P7.1 -29.983,127.046 -29.983,122.453 -29.354,121.825 Q4.3
NetQ1_3: Q1.3 U2.1 | length 4
  Top Layer w0.25: U2.1 -13.722,107.88 -13.513,107.671 v1(-12.319,107.671)
  Bottom Layer w0.25: Q1.3@-12.319,106.356 v1(-12.319,107.671)
NetQ2_3: Q2.3 U2.16 | length 4.2
  Top Layer w0.25: Q2.3 -29.11,111.881 -28.722,111.493 U2.16
NetQ3_1: Q3.1 U2.52 | length 4
  Top Layer w0.25: U2.52 -7.808,88.826 -7.431,88.449 -7.431,86.736 Q3.1
NetQ3_2: Q3.2 R13.2 | length 5.2
  Top Layer w0.25: Q3.2@-7.32,84.725 R13.2
NetQ4_1: Q4.1 U1.37 | length 35.6
  Top Layer w0.25: U1.37 -5.264,121.686 -4.851,122.098 v1(-3.683,122.098)
  Bottom Layer w0.25: Q4.1 -22.672,120.482 -21.633,121.522 -21.633,126.86 -19.867,128.625 -4.166,128.625 -3.719,128.178 -3.719,122.134 v1(-3.683,122.098)
NetQ6_2: Q6.2 R6.2 | length 5.2
  Top Layer w0.25: R6.2 -29.378,120.107 -28.372,119.101 -26.416,119.101 -25.999,118.684 Q6.2 Q6.2@-26.181,117.85
NetR1_1: R1.1 R2.2 U3.5 | length 6.3
  Bottom Layer w0.254: U3.5 -5.146,90.562 -2.602,90.562 -1.744,89.704 R1.1 -1.744,88.553 -1.956,88.341 R2.2
NetR8_1: R8.1 U2.31 | length 6.7
  Top Layer w0.25: U2.31 -32.413,91.826 -31.91,92.329 v1(-31.834,92.329)
  Bottom Layer w0.25: R8.1 -33.409,92.862 -32.799,92.253 -31.91,92.253 v1(-31.834,92.329)
NetR9_1: R9.1 U2.32 | length 4.7
  Top Layer w0.25: U2.32 -30.966,90.826 v1(-30.945,90.805)
  Bottom Layer w0.25: R9.1 -30.966,90.826 v1(-30.945,90.805)
NetR10_1: R10.1 U2.33 | length 7.7
  Top Layer w0.25: U2.33 -32.684,89.826 -32.139,89.281 v1(-32.139,86.995)
  Bottom Layer w0.25: v1(-32.139,86.995) R10.1
NetR11_2: R11.2 U1.33 | length 3.9
  Top Layer w0.25: U1.33 -8.772,120.053 -8.479,119.761 R11.2
NetU1_29: U1.29 U4.4 | length 1.9
  Top Layer w0.25: U4.4@-11.369,119.217 -10.772,119.814 U1.29 U1.29@-10.772,120.891
NetU1_30: U1.30 U4.3 | length 1.9
  Top Layer w0.25: U1.30@-10.272,120.891 U1.30 -10.272,119.812 U4.3@-9.708,119.248
VBAT: C2.1 C3.2 C4.2 D3.1 FB1.1 U2.55 U2.56 U2.57 | length 19
  Top Layer w0.25: D3.1 -3.142,89.771 -2.438,90.475 v1(-2.438,91.557) v1@-2.438,91.567
  Top Layer w0.6: U2.55 -8.692,91.826 -8.382,92.136 -8.382,92.826 ; U2.56 -8.382,92.826 ; U2.57 -8.685,93.826 -8.382,93.523 -8.382,92.826 ; C4.2@-6.965,92.826 -8.382,92.826 ; C4.2 C3.2 -3.692,92.821 v1@-2.438,91.567
  Bottom Layer w0.6: FB1.1 -2.512,93.294 C2.1 -2.413,91.582 v1(-2.438,91.557)
pads on no net: P1.3 P1.5 P1.7 P1.12 P1.17 P1.26 P5.5 P8.1 U1.1 U1.2 U1.3 U1.9 U1.10 U1.11 U1.12 U1.13 U1.14 U1.15 U1.16 U1.17 U1.18 U1.19 U1.20 U1.21 U1.24 U1.35 U1.36 U1.38 U1.43 U1.44 U1.46 U1.47 U1.48 U2.2 U2.3 U2.5 U2.6 U2.11 U2.12 U2.13 U2.14 U2.15 U2.19 U2.20 U2.21 U2.22 U2.23 U2.24 U2.25 U2.26 U2.34 U2.35 U2.36 U2.37 U2.38 U2.40 U2.41 U2.42 U2.43 U2.44 U2.47 U2.48 U2.49 U2.50 U2.51 U2.67 U2.68 U2.69 U2.70

## Polygon pours and split planes (outlines as drawn)
GND on Top Layer "GND_TOP" (solid, remove dead copper, pour order 3): -35.314,76.6 -0.894,76.6 -0.894,91.059 -0.889,91.11 -0.894,100.203 -0.889,108.89 -0.894,109.322 -0.894,130.1 -35.314,130.1
GND on Bottom Layer "GND_BOT" (solid, remove dead copper, pour order 5): -35.314,76.6 -0.894,76.6 -0.894,130.1 -35.314,130.1 -35.314,76.6

## Keep-outs
Keep-Out Layer:
  lines w0.2: -35.314,76.6 -0.894,76.6 ; -35.314,76.7 -35.314,130.1 -0.894,130.1 -0.894,76.7

## Other copper
Top Layer:
  text "2013/04" at -34.773,75.54 h0.9
  text "concentrator v1.1" at -23.825,75.539 h0.9
  text "vB" at -2.446,75.539 h0.9

## Silkscreen, mask and mechanical layers (free items; w line width, h text height)
Top Paste:
  lines w0.254: -5.664,108.077 -5.232,107.645 -3.505,107.645
Top Solder:
  lines w0.25: -36.214,75.29 -36.214,131.5 0.006,131.5 0.006,75.311 ; -36.214,75.3 0.006,75.3

## Text inside footprints (layer, text, board x,y; h text height)
P1: Bottom Overlay "1" at -0.385,80.113 h1; Bottom Overlay "25" at -34.599,80.189 h1